# Altium PCB EncoderBoard.PcbDoc
Units mil, origin at the board's own origin, x right, y up, seen from the top; angles counter-clockwise.
Board outline 5215.28 x 1965.03 mil, 2 copper layers (Top Layer, Bottom Layer); 29 components, 26 nets, 113 pads, 10 vias.
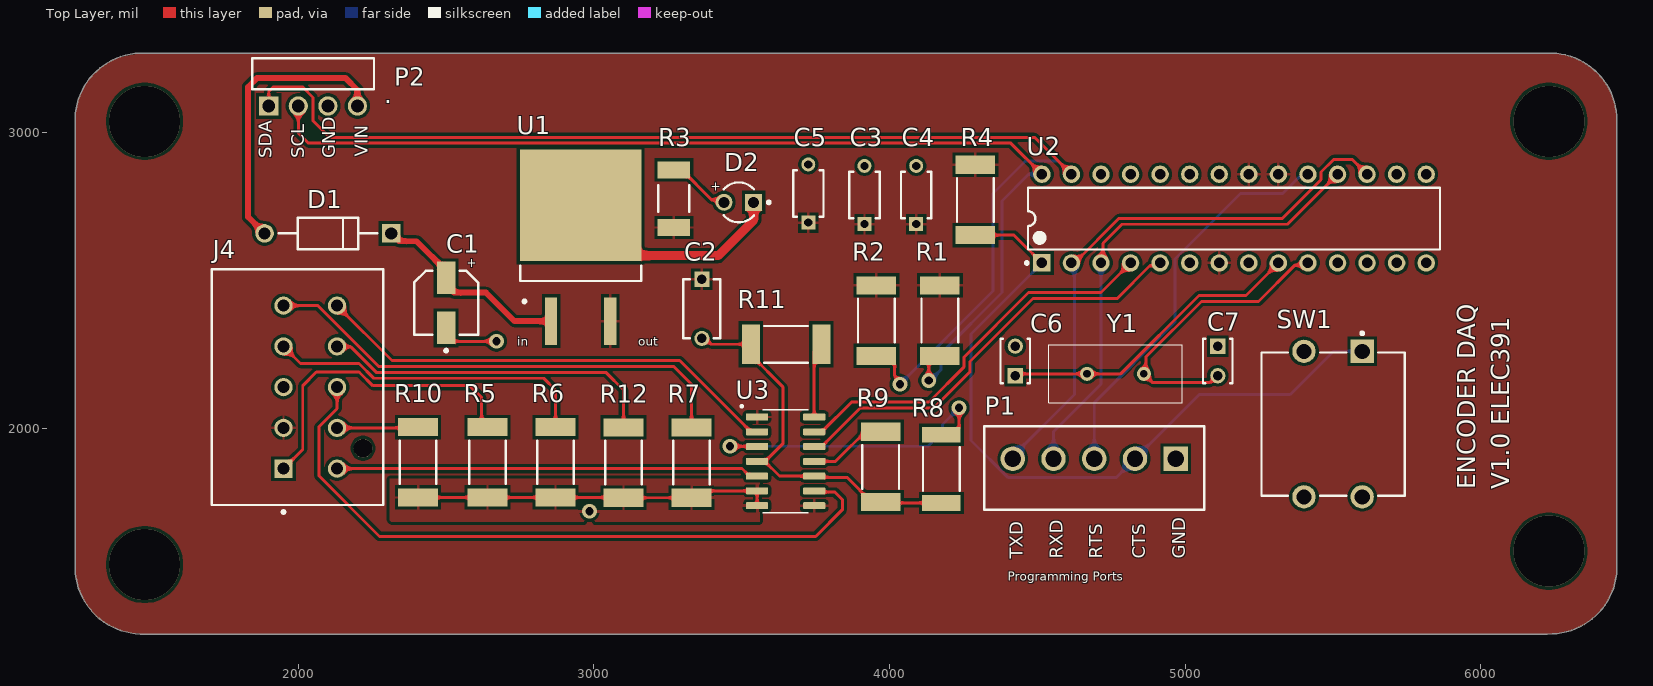
[diagram p0: Top Layer view]
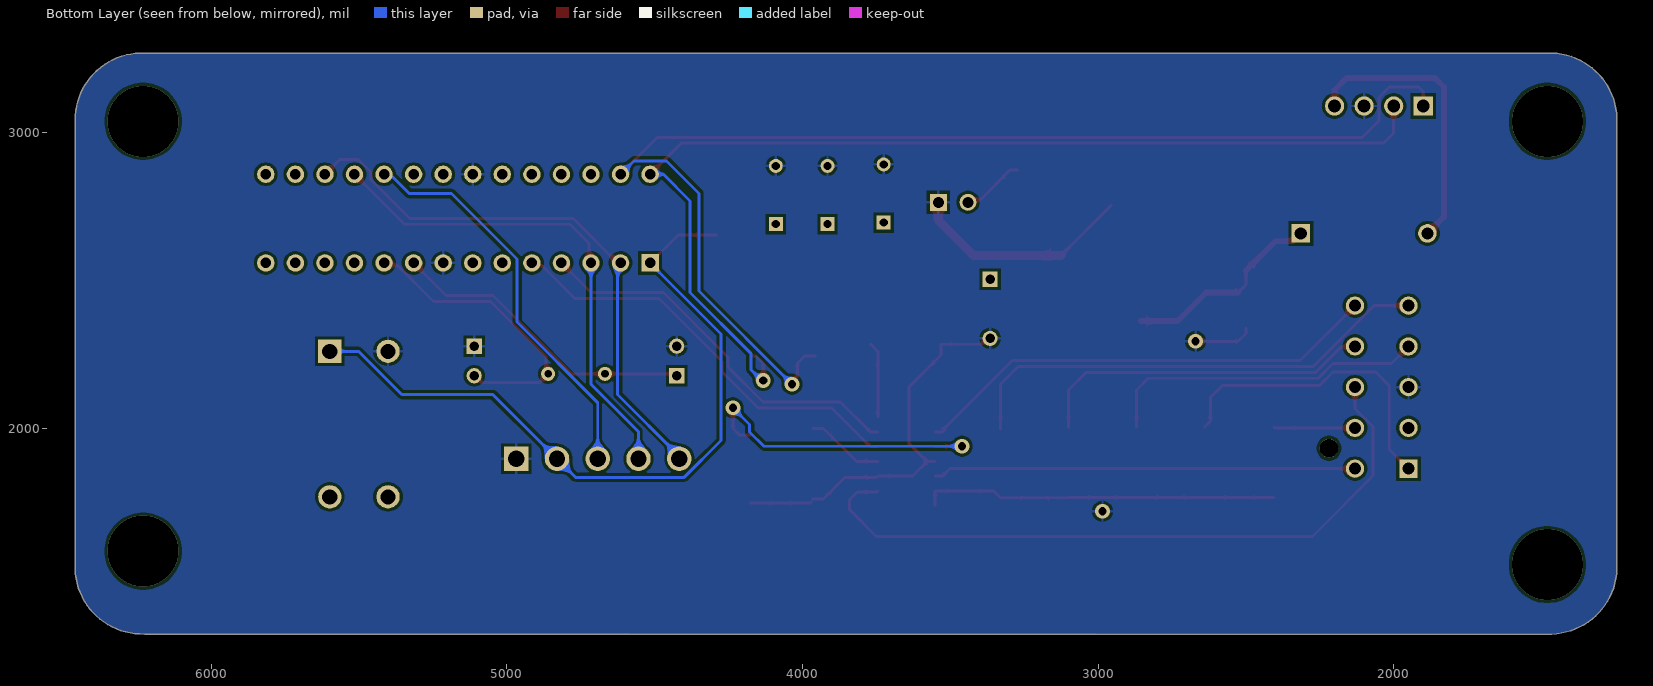
[diagram p1: Bottom Layer view, seen from below]
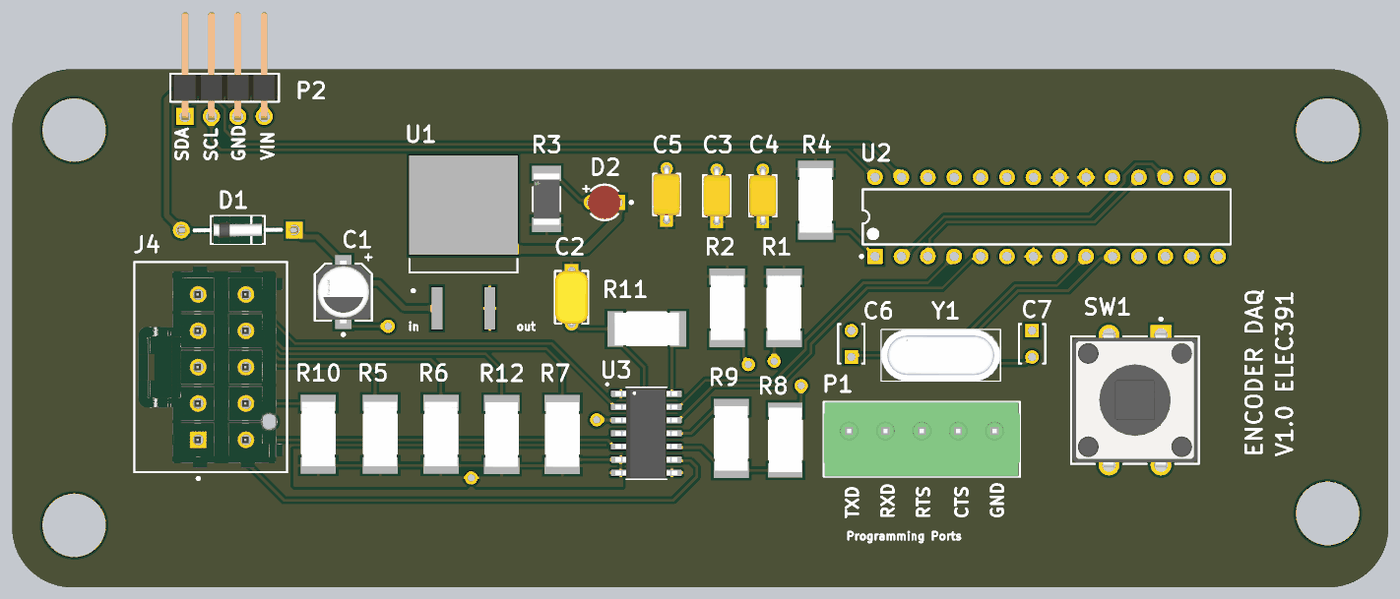
[diagram p2: 3D render of the assembled board from above, using the file's embedded part models]

## Layer stack, top to bottom
Top Solder: solder mask 0.4, Solder Resist, Dk 3.5
Top Layer: signal copper 1.4
Dielectric 1: dielectric 12.6, FR-4, Dk 4.8
Bottom Layer: signal copper 1.4
Bottom Solder: solder mask 0.4, Solder Resist, Dk 3.5

## Board outline
1464.83,1304.99 cw(c1472.5,1532.5) 1244.99,1524.83 cw(c1472.5,1532.5) 1244.98,1540.08 1244.98,3050 cw(c1250,3050) 1244.99,3050.17 cw(c1472.5,3042.5) 1480.08,3270.01 6240,3270.01 cw(c6240,3265) 6240.17,3270.01 cw(c6232.5,3042.5) 6460.14,3042.5 cw(c6232.5,3042.5) 6460.02,3034.92 6460.02,1570 6460.02,1525 cw(c6455,1525) 6460.01,1524.83 cw(c6232.5,1532.5) 6224.92,1304.98 1465,1304.98 cw(c1465,1310)

## Design rules (kind name [scope] priority, off if disabled: settings)
Clearance [All] p1: gap=10 ignorepadtopadclearanceinfootprint=FALSE except(0: Arc-Hole Track-Hole SMDPad-Hole THPad-Hole Via-Hole Fill-Hole Poly-Hole Region-Hole Text-Hole)
HoleSize [All] p1: absolutevalues=TRUE maxlimit=500 minlimit=1 maxpercent=80.000 minpercent=20.000
PolygonConnect [All] p1: connectstyle=Relief reliefconductorwidth=10 reliefentries=4 polygonreliefangle="90 Angle" airgapwidth=10
RoutingVias [All] p1: holewidth=28 width=50 viastyle="Through Hole" minholewidth=28 minwidth=50 maxholewidth=28 maxwidth=50
SolderMaskExpansion [All] p1: expansion=4 istentingtop=FALSE
Width [(InNet('5V') AND InNet('Vin'))] p1: maxlimit=50 minlimit=10 preferedwidth=20 minimp=50.000000 maximp=50.000000 favimp=50.000000
29 further rules are at their usual default settings.

## Components (designator, comment, footprint, x,y, rotation, side; value= is the part's Value field where it differs from the comment)
C1 "10uF" FP-FKC-MFG 2500,2425 r90 top
C2 "0.1uF" FP-C322C104K5R5TA-MFG 3365,2404.92 r270 top
C3 "0.1uF" FP-K15H5-MFG 3915,2790 r90 top
C4 "0.1uF" FP-K15H5-MFG 4090,2790 r90 top
C5 "0.1uF" FP-K15H5-MFG 3725,2795 r90 top
C6 "22pF" KEMT-C315-THT-2 4425,2228.5 r90 top
C7 "22pF" KEMT-C315-THT-2 5110,2228.5 r270 top
D1 "Diode" FP-UF4007-MFG 2100,2660 r180 top value=17pF
D2 "RED LED" FP-HLMP-1301-MFG 3490,2765 r180 top
J4 "EncoderA" FP-1722981210-MFG 1997.24,2140 r90 top
P1 "ProgrammingInputs" 691321100005 4692.2,1866.5 r180 top
P2 "ToMaster" 61300411021 2050,3200 r180 top
R1 "10K" FP-CRCW2512-e3-IPC_A 4170,2365 r90 top
R2 "10K" FP-CRCW2512-e3-IPC_A 3955,2365 r90 top
R3 "330Ohm" FP-CRCW2010-e3-MFG 3270,2777.44 r90 top
R4 "10K" FP-CRCW2512-e3-IPC_A 4290,2773.15 r90 top
R5 "10K" FP-CRCW2512-e3-IPC_A 2640,1885.88 r270 top
R6 "10K" FP-CRCW2512-e3-IPC_A 2870,1885.88 r270 top
R7 "10K" FP-CRCW2512-e3-IPC_A 3330,1885 r270 top
R8 "200K" FP-CRCW2512-e3-IPC_B 4175,1863.55 r90 top
R9 "10K" FP-CRCW2512-e3-IPC_A 3970,1870 r270 top
R10 "10K" FP-CRCW2512-e3-IPC_A 2405,1885.88 r270 top
R11 "10K" FP-CRCW2512-e3-IPC_A 3650,2285 r180 top
R12 "10K" FP-CRCW2512-e3-IPC_A 3100,1885 r270 top
SW1 "PushButton" FP-FSM103-MFG 5500,2015 r90 top
U1 "L7805" TO-263_M 2955,2613.27 r90 top
U2 "ATmega328P-PU" 28P3 5165,2710 r90 top
U3 "LS7082N1-S" SOIC127P600X175-14N 3648.35,1889.02 r0 top
Y1 "16MHZ" ABL16000MHZB2 4860,2185 r180 top

## Footprints (in the part's own frame and the unit in brackets; to place one, negate y for a bottom-side part, rotate by r counter-clockwise, add the part's x,y. Pads: shape width x height; smd on the part's side, far side on the other; paste and mask are expansions set on the pad)
28P3 [mm] "28-Pin Plastic Dual In-Line Package (PDIP)"
  rect 1.5x1.5 hole 0.9: 1(-3.81,16.51)
  round 1.5 hole 0.9: 2(-3.81,13.97) 3(-3.81,11.43) 4(-3.81,8.89) 5(-3.81,6.35) 6(-3.81,3.81) 7(-3.81,1.27) 8(-3.81,-1.27) 9(-3.81,-3.81) 10(-3.81,-6.35) 11(-3.81,-8.89) 12(-3.81,-11.43) 13(-3.81,-13.97) 14(-3.81,-16.51) 15(3.81,-16.51) 16(3.81,-13.97) 17(3.81,-11.43) 18(3.81,-8.89) 19(3.81,-6.35) 20(3.81,-3.81) 21(3.81,-1.27) 22(3.81,1.27) 23(3.81,3.81) 24(3.81,6.35) 25(3.81,8.89) 26(3.81,11.43) 27(3.81,13.97) 28(3.81,16.51)
  silkscreen extent -3.93,-17.7 2.65,17.93, body extent -3.6,-17.65 3.6,17.65, height 4.58
61300411021 [mm] "Pin Header, pitch 2.54 mm, THT, Angled, single row, 4p"
  rect 1.65x1.65 hole 1.1: 1(3.81,2.77)
  round 1.65 hole 1.1: 2(1.27,2.77) 3(-1.27,2.77) 4(-3.81,2.77)
  silkscreen extent -5.23,-1.35 5.23,1.35, body extent -5.08,-7.27 5.08,3.09, height 2.58
691321100005 [mm] "Vertical PCB Header, pitch 3.5mm, 05p"
  rect 2.1x2.1 hole 1.4: 1(-7,-0.8)
  round 2.1 hole 1.4: 2(-3.5,-0.8) 3(0,-0.8) 4(3.5,-0.8) 5(7,-0.8)
  silkscreen extent -9.45,-3.6 9.45,3.6, body extent -9.45,-3.6 9.45,3.6, height 9.3
ABL16000MHZB2 [mm]
  round 1.205 hole 0.657: 1(0,0) 2(4.88,0)
  silkscreen extent -3.31,-2.5 8.19,2.5, body extent -3.31,-2.5 8.19,2.5, height 3.5
FP-1722981210-MFG [mm]
  rect 1.57x1.57 hole 1.02 paste-1000 mask+0: 1(-7,1.2)
  round 1.57 hole 1.02 paste-1000 mask+0: 2(-3.5,1.2) 3(0,1.2) 4(3.5,1.2) 5(7,1.2) 6(-7,-3.4) 7(-3.5,-3.4) 8(0,-3.4) 9(3.5,-3.4) 10(7,-3.4)
  round 1.6 hole 1.6 unplated paste-1000 mask+0: ""(-5.25,-5.63)
  silkscreen extent -10.85,-7.35 10.12,7.35, body extent -10.23,-7.45 10.23,7.45, height 0.25
FP-C322C104K5R5TA-MFG [mm]
  rect 1.3x1.3 hole 0.8 paste-1000 mask+0: 1(-2.54,0)
  round 1.3 hole 0.8 paste-1000 mask+0: 2(2.54,0)
  silkscreen extent -2.54,-1.59 2.54,1.59, body extent -3.29,-1.69 3.29,1.69, height 0.25
FP-CRCW2010-e3-MFG [mm]
  rect 1.45x2.8 smd paste+0 mask+0: 1(-2.475,0) 2(2.475,0)
  silkscreen extent -1.14,-1.33 1.14,1.33, body extent -3.3,-1.5 3.3,1.5, height 0.25
FP-CRCW2512-e3-IPC_A [mil]
  rect 61.22x134.18 smd paste+0 mask+0: 1(-119.12,0) 2(119.12,0)
  silkscreen extent -74,-62 74,62, body extent -169,-87 169,87, height 10
FP-CRCW2512-e3-IPC_B [mil]
  rect 53.34x130.24 smd paste+0 mask+0: 1(-115.18,0) 2(115.18,0)
  silkscreen extent -74,-62 74,62, body extent -152,-75 152,75, height 10
FP-FKC-MFG [mm]
  rect 2.8x1.6 smd paste+0 mask+0: 1(-2.15,0) 2(2.15,0)
  silkscreen extent -4.22,-2.75 2.75,2.75, body extent -3.8,-3 3.8,3, height 0.25
FP-FSM103-MFG [mm]
  rect 2x2 hole 1.3 paste-1000 mask+0: 1(6.25,-2.5)
  round 2 hole 1.3 paste-1000 mask+0: 2(-6.25,-2.5) 3(6.25,2.5) 4(-6.25,2.5)
  silkscreen extent -6.15,-6.15 7.92,6.15, body extent -7.35,-6.25 7.35,6.25, height 0.25
FP-HLMP-1301-MFG [mm]
  rect 1.45x1.45 hole 0.95 paste-1000 mask+0: 1(-1.27,0)
  round 1.45 hole 0.95 paste-1000 mask+0: 2(1.27,0)
  silkscreen extent -2.7,-1.71 1.3,1.71, body extent -2.22,-2.22 2.22,2.22, height 0.25
FP-K15H5-MFG [mm]
  rect 1.2x1.2 hole 0.7 paste-1000 mask+0: 1(-2.5,0)
  round 1.2 hole 0.7 paste-1000 mask+0: 2(2.5,0)
  silkscreen extent -2,-1.3 2,1.3, body extent -3.2,-1.4 3.2,1.4, height 0.25
FP-UF4007-MFG [mm]
  rect 1.6x1.6 hole 1.05 paste-1000 mask+0: 1(-5.438,0)
  round 1.6 hole 1.05 paste-1000 mask+0: 2(5.438,0)
  silkscreen extent -4.24,-1.35 4.24,1.35, body extent -6.34,-1.45 6.34,1.45, height 0.25
KEMT-C315-THT-2 [mm] "THD, 2-Leads, Body 3.81x2.54mm"
  rect 1.3x1.3 hole 0.8: 1(-1.27,0)
  round 1.3 hole 0.8: 2(1.27,0)
  silkscreen extent -1.91,-1.27 1.91,1.27, body extent -1.91,-1.27 1.91,1.27, height 4.66
SOIC127P600X175-14N [mm]
  rrect25% 1.9x0.6 smd: 1(-2.455,3.81) 2(-2.455,2.54) 3(-2.455,1.27) 4(-2.455,0) 5(-2.455,-1.27) 6(-2.455,-2.54) 7(-2.455,-3.81) 8(2.455,-3.81) 9(2.455,-2.54) 10(2.455,-1.27) 11(2.455,0) 12(2.455,1.27) 13(2.455,2.54) 14(2.455,3.81)
  silkscreen extent -3.87,-4.43 1.95,4.82, body extent -3,-4.32 3,4.32, height 1.75
TO-263_M [mm] "D2-PAK, 4-Leads, Body 9.2x10.2mm, Pitch 2.54mm, Lead Span 15.4mm, IPC Low Density"
  rect 4.1x1.05 smd: 1(-6.35,2.54) 3(-6.35,-2.54)
  rect 9.6x10.45 smd: 4(3.6,0)
  silkscreen extent -4.78,-5.2 -1.6,5.2, body extent -2.9,-5.2 6.45,5.2, height 4.6

## Part data
C1: library part CMP-05427-000030-1, "CAP ALUM 10UF 20% 50V SMD", Case/Package=Radial, Dielectric Material=Aluminium, ESR (Equivalent Series Resistance)=1.52R, Leakage Current=3uA, Max Operating Temperature=105°C, Min Operating Temperature=-55°C, Package Quantity=1000, Ripple Current=85mA, Tolerance=20%, Voltage=50V, Capacitance=10uF, Construction=Cylindrical, Contact Plating=Tin, Diameter=5mm, Height=5.8mm, Height - Seated (Max)=0.228inch, Impedance=1.52R, Lead Free="Lead Free", Length=5.8mm, Life (Hours)=2000Hour, Material=Aluminium, Mount="Surface Mount", Number of Pins=2, Packaging="Tape and Reel", Radiation Hardening=No, REACH SVHC="No SVHC", Ripple Current (AC)=85mA, RoHS Compliant=Yes, Series=FK, Termination=SMD/SMT, Voltage Rating=50V, Voltage Rating (DC)=50V, Width=6.5mm
C2: library part CMP-03020-034661-1, "CAP CER 0.1UF 50V X7R RADIAL", Capacitance=100nF, Case/Package=Radial, Dielectric=X7R, Dielectric Material=Ceramic, Max Operating Temperature=125°C, Min Operating Temperature=-55°C, Package Quantity=500, Tolerance=10%, Voltage=50V, Construction=RADIAL, Depth=3.18mm, Dissipation Factor=2.5%, Height=3.18mm, Height - Seated (Max)=0.26inch, Lead Diameter=0.51mm, Lead Free="Lead Free", Lead Length=7mm, Lead Pitch=5.08mm, Lead/Base Style="Formed Leads", Length=5.08mm, Material=Ceramic, Mount="Through Hole", Number of Pins=2, Packaging=Bulk, Radiation Hardening=No, REACH SVHC="No SVHC", RoHS Compliant=Yes, Series="Golden Max™", Termination=Radial, Voltage Rating=50V, Voltage Rating (DC)=50V, Weight=0.0625lb, Width=0.125inch
C3 C4 C5: library part CMP-02417-000048-1, "CAP CER 0.1UF 50V X7R RADIAL", Capacitance=100nF, Case/Package=Dipped, Dielectric=X7R, Max Operating Temperature=125°C, Min Operating Temperature=-55°C, Package Quantity=5000, Tolerance=10%, Voltage=50V, Construction=RADIAL, Depth=2.5mm, Diameter=500um, Height=4mm, Height - Seated (Max)=0.1inch, Lead Diameter=0.5mm, Lead Length=30mm, Lead Pitch=5mm, Lead/Base Style="Formed Leads", Length=4mm, Mount="Through Hole", Packaging=Bulk, Radiation Hardening=No, RoHS Compliant=Yes, Series=K, Termination=Radial, Thickness=2.6mm, Voltage Rating=50V, Voltage Rating (DC)=50V, Weight=0.005644oz, Width=2.5mm
C6 C7: library part CMP-1664-00008-1, "Capacitor, Ceramic, 22 pF, +/-10 %, 100 V, -55 to 125 degC, 2-Pin THD, RoHS, Bulk", Case\Package=TO-220, Max Input Voltage="40 V", Max Operating Temperature="125 degC", Max Ouput Current="1.5 A", Min Input Voltage="4.2 V", Min Operating Temperature="0 degC", Output Voltage="1.2 V", Package Quantity=50, ComponentLink1Description="Manufacturer URL", ComponentLink1URL=http://www.kemet.com/, ComponentLink2Description=Datasheet, ComponentLink2URL=http://capacitoredge.kemet.com/capedge2/DataSheet/Datasheet-C315C220K1G5TA.pdf?pn=C315C220K1G5TA{BULK}, DatasheetVersion=Aug-16, Height="9.28 mm", Length="10.28 mm", Mount="Through Hole", Output Current="1.5 A", Outputs=1, PackageDescription="2-Pin Through Hole Device, Body 3.81 x 2.54 mm", PackageReference=C315-THT-2, Packaging=Rail/Tube, Pins=3, Radiation Hardening=No, REACH SVHC="No SVHC", RoHSCompliant=true, Weight="0.08113 oz", Width="4.82 mm"
D1: library part CMP-02540-000043-1, "DIODE GEN PURP 1KV 1A DO204AL", Capacitance=17pF, Forward Current=1A, Manufacturer=Vishay, Manufacturer Part Number=UF4007-E3/54, Max Junction Temp=+150°C, Max Repetitive Reverse Voltage=1000V, Max Surge Forward Current=30A, Package=UF4007, Peak Reverse Current=10uA, Temperature="-55°C to +150°C", Temperature Range Low=-55°C, Automotive=No, Category=Diode, ComponentLink2Description=Datasheet, ComponentLink2URL=http://www.vishay.com/docs/88755/uf4001.pdf, Device Class L1="Discrete Semiconductors", Device Class L2=Diodes, Device Class L3="Rectifier Diodes", Digikey Description="DIODE GEN PURP 1KV 1A DO204AL", Height=2.7mm, Ipc Land Pattern Name=DIOPA1088W105L520D270, Lead Free=Yes, Mouser Description="Rectifiers Vr/1000V Io/1A", Octopart=https://octopart.com/uf4007-e3%2F54-vishay-42333894, RoHS=TRUE, Temperature Range High=+150°C
D2: library part CMP-18399-000007-1, "LED RED DIFFUSED T-1 T/H", Colour=Red, Forward Current=10mA, Forward Voltage=1.9V, Manufacturer=Broadcom, Manufacturer Part Number=HLMP-1301, Max Junction Temp=+110°C, Package=0, Reverse Voltage=5V, Temperature="-40°C to +100°C", Temperature Range High=+100°C, Temperature Range Low=-40°C, Automotive=No, Category=Diode, ComponentLink2Description=Datasheet, ComponentLink2URL=https://docs.broadcom.com/docs/AV02-1555EN, Device Class L1=Optoelectronics, Device Class L2=LEDs, Device Class L3=unset, Digikey Description="LED RED DIFFUSED T-1 T/H", Lead Free=Yes, Led Orientation=Straight, Luminous Intensity=3.4mcd, Mouser Description="Standard LEDs - Through Hole Red Diffused 635nm 3.4mcd", Octopart=https://octopart.com/hlmp-1301-broadcom-71130345, Peak Emmision Wavelength=635nm, RoHS=TRUE, Viewing Angle=60°, Wavelength=626nm
J4: library part CMP-04776-000117-1, "CONN HEADER VERT 10POS 3.5MM", Current Rating=11A, Manufacturer=Molex, Manufacturer Part Number=1722981210, Package=0, Temperature="-40°C to +120°C", Temperature Range High=+120°C, Temperature Range Low=-40°C, Voltage Rating=400V, Automotive=No, Category=Conn, ComponentLink2Description=Datasheet, ComponentLink2URL=http://www.molex.com/webdocs/datasheets/pdf/en-us/1722981210_PCB_HEADERS.pdf, Conn Gender=Male, Conn Orientation=Vertical, Contact Material=Tin,Nickel, Device Class L1=Connectors, Device Class L2="Headers and Wire Housings", Device Class L3=unset, Digikey Description="CONN HEADER VERT 10POS 3.5MM", Footprint Url=https://www.molex.com/pdm_docs/sd/1722981210_sd.pdf, Height=14.5mm, Lead Free=Yes, Number of Contacts=10, Number of Rows=2, Octopart=https://octopart.com/172298-1210-molex-60759931, Pitch=3.5mm, RoHS=TRUE, Standoff Height=0.35mm
P1: library part CMP-1502-01786-1, "Serie 3211 - 3.50mm Vertical PCB Header WR-TBL, 5 pin", Manufacturer="Wurth Elektronik", Operating Temperature=-40to105degC, Package Reference=691321100005, Datasheet URL=http://katalog.we-online.de/em/datasheet/6913211000xx.pdf, Gender=Male, Manufacturer URL=http://www.we-online.de, Mounting Technology=THT, Packaging=Box, Part Number=691321100005, Pin Number=5, Pitch=3.50mm, Publisher=WurthElektronik
P2: library part CMP-1502-01063-1, "THT Angled Pin Header WR-PHD, Pitch 2.54 mm, Single Row, 4 pins", Contact Resistance=20mOhm, Manufacturer="Wurth Elektronik", Operating Temperature=-40to105degC, Package Reference=61300411021, Rated Current=3A, Withstanding Voltage=500VAC, Working Voltage=250VAC, Datasheet URL=https://katalog.we-online.de/em/datasheet/6130xx11021.pdf, Gender=Male, Manufacturer URL=http://www.we-online.de, Mounting Technology=THT, Orientation=Angled, Packaging=Bag, Part Number=61300411021, Pin Number=4, Pitch=2.54mm, Publisher=WurthElektronik, Row Number=Single
R1 R2 R4 R5 R6 R7 R9 R10 R11 R12: library part CMP-02407-002758-1, "RES Thick Film, 10kΩ, 5%, 1W, 200ppm/°C, 2512", Case Code (Imperial)=2512, Case Code (Metric)=6432, Max Operating Temperature=155°C, Max Power Dissipation=1W, Min Operating Temperature=-55°C, Package Quantity=1, Resistance=10kR, Temperature Coefficient=200ppm/°C, Tolerance=5%, Voltage Rating=500V, Case/Package=2512, Composition="Thick Film", Contact Plating=Tin, Depth=3.15mm, Features="Automotive AEC-Q200", Height=0.028inch, Lead Free="Lead Free", Length=6.3mm, Military Standard=Not, Mount="Surface Mount", Number of Pins=2, Number of Terminations=2, Packaging="Tape and Reel", Power Rating=1W, Radiation Hardening=No, REACH SVHC="No SVHC", Termination=SMD/SMT, Voltage Rating (DC)=500V, Weight=0.001429oz, Width=0.124inch
R3: library part CMP-1017-00062-2, "RES Thick Film, 330Ω, 5%, 0.75W, 200ppm/°C, 2010", Case Code (Imperial)=2010, Case Code (Metric)=5025, Max Operating Temperature=155°C, Max Power Dissipation=750mW, Min Operating Temperature=-55°C, Package Quantity=4000, Resistance=330R, Temperature Coefficient=200ppm/°C, Tolerance=5%, Voltage Rating=400V, Case/Package=2010, Composition="Thick Film", Contact Plating=Tin, Depth=2.5mm, Features="Automotive AEC-Q200", Height=0.6mm, Lead Free="Lead Free", Length=5mm, Military Standard=Not, Number of Terminations=2, Packaging="Tape and Reel", Power Rating=750mW, Radiation Hardening=No, Termination=SMD/SMT, Voltage Rating (DC)=400V, Weight=0.000899oz, Width=2.5mm
R8: library part CMP-02407-005119-1, "RES Thick Film, 200kΩ, 5%, 1W, 200ppm/°C, 2512", Case Code (Imperial)=2512, Case Code (Metric)=6432, Max Operating Temperature=155°C, Max Power Dissipation=1W, Min Operating Temperature=-55°C, Package Quantity=1, Resistance=200kR, Temperature Coefficient=200ppm/°C, Tolerance=5%, Voltage Rating=500V, Case/Package=2512, Composition="Thick Film", Contact Plating=Tin, Features="Automotive AEC-Q200", Height=0.028inch, Lead Free="Lead Free", Length=6.3mm, Mount="Surface Mount", Number of Pins=2, Number of Terminations=2, Packaging="Tape and Reel", Power Rating=1W, Radiation Hardening=No, Voltage Rating (DC)=500V, Weight=0.001429oz, Width=3.15mm
SW1: library part CMP-03407-000037-1, "SWITCH TACTILE SPST-NO 0.05A 24V", Actuator Color=Black, Contact Current Rating=50mA, Contact Resistance=100mR, Max Operating Temperature=85°C, Max Voltage Rating (DC)=12V, Min Operating Temperature=-35°C, Operating Force=1.57N, Package Quantity=400, Voltage Rating=24V, Actuator Length=3.4mm, Actuator Material=Polyester, Contact Material=Brass, Contact Plating=Silver, Current Rating=50mA, Depth=14.1mm, Electrical Life=100000Cycles, Illumination Type=Non-Illuminated, Length=12mm, Max Current Rating=50mA, Mechanical Life=100000Cycles, Mount="Through Hole", Orientation=Straight, Packaging="Loose Piece", Radiation Hardening=No, RoHS Compliant=Yes, Series="FSM100 ~ 104", Switch Function=Off-Mom, Switch Travel=0.3mm, Termination="PC Pins", Throw Configuration=SPST, Type=Switch, Voltage Rating (DC)=12V, Width=12mm
U1: library part CMP-0244-00213-1, "Positive Voltage Regulator, 3-Pin D2PAK, Tape and Reel", ComponentLink1Description="Manufacturer URL", ComponentLink1URL=http://www.st.com, ComponentLink2Description=Datasheet, ComponentLink2URL=http://www.st.com/internet/com/TECHNICAL_RESOURCES/TECHNICAL_LITERATURE/DATASHEET/CD00000444.pdf, DatasheetVersion=16/11/2011, PackageDescription="3-Pin Transistor Outline Package 2.54 mm Pitch, 15.4 mm Lead Span (D2PAK)", PackageReference=TO-263, PackageVersion=2011
U2: library part CMP-0095-00013-2, "8-bit AVR Microcontroller, 32KB Flash, 1KB EEPROM, 2KB SRAM, 28-pin PDIP, Industrial Grade (-40°C to 85°C)", ComponentLink1Description="Manufacturer URL", ComponentLink1URL=http://www.atmel.com/, ComponentLink2Description="ATmega48A/48PA/88A/88PA/168A/168PA/328/328P Datasheet", ComponentLink2URL=http://www.atmel.com/dyn/resources/prod_documents/8271.pdf, ComponentLink3Description="ATmega48A/48PA/88A/88PA/168A/168PA/328/328P Summary", ComponentLink3URL=http://www.atmel.com/dyn/resources/prod_documents/8271S.pdf, DatasheetVersion="revD, May-2011", PackageDescription="28-lead (0.300\"/7.62mm Wide) Plastic Dual Inline Package (PDIP)", PackageReference=28P3, PackageVersion="revB, Sep-2001", RevisionNote="DatasheetVersion updated. URLs added."
U3: Package=None, Availability=Unavailable, MF="{'manufacturer': u'LSI/CSI'}", MP=LS7082N1-S, Price=None
Y1: library part ABL-16.000MHZ-B2, "Crystal or Oscillator", Manufacturer_Name=ABRACON, Mouser Part Number=815-ABL-16-B2, Arrow Part Number=ABL-16.000MHZ-B2, Arrow Price/Stock=https://www.arrow.com/en/products/abl-16.000mhz-b2/abracon, Datasheet Link=http://www.abracon.com/Resonators/ABL.pdf, Height=3.5mm, Manufacturer_Part_Number=ABL-16.000MHZ-B2, Mouser Price/Stock=https://www.mouser.co.uk/ProductDetail/ABRACON/ABL-16000MHZ-B2?qs=A7YjigRBFZlH19Ss3q%252BAbA%3D%3D

## Via types
v1: diameter 50, hole 28, Top Layer to Bottom Layer, 6 vias
v2: diameter 240, hole 240, Top Layer to Bottom Layer, 4 vias

## Nets (pads, with @x,y where several pads share a name; then routed paths per layer and width w, separated by ;. In a path a pad name is that pad's centre, name@x,y a point inside that pad or via, vN(x,y) a via of type N, cw(c..) or ccw(c..) an arc to the next point about the centre after c; other vN are vias at no path point)
5V: C2.1 C3.1 C4.1 C5.1 J4.2 R1.2 R2.2 R3.1 R4.2 U1.3 U2.7 U2.20 U2.21 U3.1 U3.8
A: J4.6 U3.5 | length 1431.1
  Top Layer w10: J4.6 3500.71,1864.41 3526.1,1839.02 U3.5
B: J4.8 U3.9 | length 2359.5
  Top Layer w10: J4.8 2131.1,2067.12 2070,2006.02 2070,1840 2275,1635 3750,1635 3840,1725 3840,1760 3814.84,1785.16 3748.86,1785.16 U3.9
CTS: P1.2 R4.1 SW1.1 U2.1 | length 2515.1
  Top Layer w10: R4.1 4420.97,2654.03 U2.1
  Bottom Layer w10: U2.1 4275,2320 4275,1959.93 4399.93,1835 4767.01,1835 P1.2 5047.01,2115 5355,2115 5501.06,2261.06 SW1.1
DNCK: U2.5 U3.12 | length 1447.7
  Top Layer w10: U3.12 3770.59,1939.02 3901.57,2070 4150,2070 4272.09,2192.09 4272.09,2227.09 4485,2440 4770,2440 4881.01,2551.01 4906.01,2551.01 U2.5
GND: C1.1 C2.2 C3.2 C4.2 C5.2 C6.2 C7.1 D2.1 J4.3 P1.1 P2.3 R5.2 R6.2 R7.2 R8.1 R9.2 R10.2 R11.2 R12.2 SW1.3 U1.4 U2.8 U2.22 U3.4 U3.6 U3.7 U3.10 | length 3486.8
  Top Layer w10: R10.2 R5.2 R6.2 3099.12,1766.76 R12.2 R7.2 3353.14,1789.02 U3.6 U3.7 ; C1.1 2500,2321.5 2526.5,2295 v1(2670,2295) ; U1.4 U1.4@3125,2585 ; C2.2 3376.14,2304.92 3396.06,2285 R11.2 3530.88,2248.52 3640,2139.4 3640,1950 3585.83,1895.83 3584.09,1895.83 3579.02,1890.75 3579.02,1889.02 U3.4 ; U3.4@3577.28,1889.02 3627.28,1839.02 U3.10 3749.02,1835 3855.66,1835 3928.52,1762.14 R9.2@3965,1762.14 ; R9.2 3972.52,1748.36 R8.1
  Top Layer w30: U1.4@3125,2585 3420,2585 3540,2705 D2.1
  other v1: 2985,1720
I: J4.10 U3.2 | length 1600.1
  Top Layer w10: J4.10 2316.69,2230 3290,2230 3519.29,2000.71 3519.29,1995.83 3526.1,1989.02 U3.2
NetC1_2: C1.2 D1.1 U1.1 | length 691.5
  Top Layer w10: D1.1 D1.1@2340.59,2633.5 ; C1.2@2500,2533.27 C1.2 2500,2486.02 C1.2@2526.5,2459.53
  Top Layer w20: D1.1@2340.59,2633.5 2399.76,2633.5 C1.2@2500,2533.27 ; C1.2@2526.5,2459.53 2634.78,2459.53 2731.04,2363.27 U1.1
NetC6_1: C6.1 U2.9 Y1.2 | length 1048
  Top Layer w10: C6.1 4431.5,2185 Y1.2 4781.5,2185 5046.5,2450 5205,2450 U2.9
NetC7_2: C7.2 U2.10 Y1.1 | length 1011.8
  Top Layer w10: C7.2 5107.89,2178.5 5084.38,2155 4890,2155 Y1.1 4866.57,2191.57 4866.57,2241.57 5055,2430 5247.97,2430 5370.47,2552.5 5407.5,2552.5 U2.10
NetD2_2: D2.2 R3.2 | length 215.5
  Top Layer w10: R3.2 3296.57,2874.88 3397.45,2774.01 3430.99,2774.01 D2.2
NetJ4_1: J4.1 R5.1 | length 1075.4
  Top Layer w10: J4.1 2015,1929.41 2015,2145 2060.95,2190.95 2061.2,2190.97 2205.95,2190.97 2208.88,2188.04 2251.92,2145 2580,2145 2620.25,2104.75 2620.25,2024.75 R5.1
NetJ4_4: J4.4 R6.1 | length 1107.9
  Top Layer w10: J4.4 1950,2275 1952.8,2275 2007.8,2220 2205.2,2220 2255.2,2170 2830,2170 2870,2130 R6.1
NetJ4_5: J4.5 R7.1 | length 1650.3
  Top Layer w10: J4.5@1950,2425 J4.5 2066.18,2415.59 2271.77,2210 3270,2210 3330,2150 R7.1@3330,1999.12
NetJ4_7: J4.7 R10.1 | length 275.1
  Top Layer w10: J4.7 2402.2,2002.2 R10.1
NetJ4_9: J4.9 R12.1 | length 1156
  Top Layer w10: J4.9 2132.42,2276.48 2177.01,2276.48 2263.49,2190 3040,2190 3100,2130 R12.1
NetR8_2: R8.2 U3.3 | length 1074.3
  Top Layer w10: v1(3460,1940) 3460.49,1939.51 3551.2,1939.51 U3.3 ; R8.2 4213.45,1978.73 4235.12,2000.4 4235.12,2069.88 v1(4235,2070)
  Bottom Layer w10: v1(3460,1940) 4130,1940 4178.67,1988.67 4178.67,2013.67 v1(4235,2070)
NetR9_1: R9.1 U3.11 | length 266.1
  Top Layer w10: U3.11 3817.15,1889.02 3928.52,2000.38 R9.1@3965,2000.38
NetR11_1: R11.1 U3.14 | length 256
  Top Layer w10: U3.14 3745,2260.88 R11.1
RTS: P1.3 U2.19 | length 1356.9
  Bottom Layer w10: P1.3 4692.2,2087.2 4965,2360 4965,2572.97 5187.03,2795 5330,2795 5385.61,2850.61 5405.61,2850.61 U2.19
RXD: P1.4 U2.3 U2.18 | length 1687.9
  Top Layer w10: U2.3 4721.49,2566.49 4721.49,2626.49 4785.94,2690.94 5345.94,2690.94 U2.18
  Bottom Layer w10: P1.4 4554.41,1989.41 4715,2150 U2.3
SCL: P2.2 R1.1 U2.28 | length 3655.5
  Top Layer w10: P2.2 2000,2999.22 2034.22,2965 4410,2965 U2.28 ; v1(4132.57,2162.43) 4132.57,2220.27 4158.18,2245.88 R1.1
  Bottom Layer w10: v1(4132.57,2162.43) 4137.43,2162.43 4174.37,2199.37 4174.37,2254.37 4380,2460 4380,2770 4470,2860 U2.28
SDA: P2.1 R2.1 U2.27 | length 4193.8
  Top Layer w10: P2.1 1900,3140 1915,3155 2015,3155 2050,3120 2050,3040.94 2105.94,2985 4490,2985 U2.27 ; R2.1 3991.48,2245.88 4017.09,2220.27 4017.09,2178.73 4035,2160.82 v1(4035,2150)
  Bottom Layer w10: v1(4035,2150) 4350,2465 4350,2795 4460,2905 4570,2905 U2.27
TXD: P1.5 U2.2 U2.17 | length 1933.3
  Top Layer w10: U2.2 4625,2560 4775.94,2710.94 5328.92,2710.94 5459.53,2841.56 5459.53,2867.5 5502.03,2910 5565,2910 U2.17
  Bottom Layer w10: P1.5 4416.61,1906.61 4625,2115 4625,2536.73 4615,2546.73 U2.2
UPCK: U2.4 U3.13 | length 1325.9
  Top Layer w10: U3.13 3770.59,1989.02 3871.57,2090 4133.03,2090 4252.09,2209.06 4252.09,2235.38 4252.09,2242.09 4470,2460 4715,2460 U2.4
Vin: D1.2 P2.4 | length 971.2
  Top Layer w20: D1.2 1830,2715.91 1830,3155 1860,3185 2160,3185 2200,3145 P2.4
pads on no net: J4. SW1.2 SW1.4 U2.6 U2.11 U2.12 U2.13 U2.14 U2.15 U2.16 U2.23 U2.24 U2.25 U2.26
copper on no net:
  other v2: 1480,1540 6230,1585 1480,3039.18 6230,3039.18

## Polygon pours and split planes (outlines as drawn)
5V on Top Layer "5V_L01_P002" (solid, pour order 2): 1355.38,3237.7 1393.75,3256.09 1465,3270.01 6190,3270.01 6242.5,3269.35 6269.79,3267.07 6295.21,3261.33 6340.84,3242.71 6380.44,3215.51 6409.76,3185.32 6433.2,3149.92 6450.59,3107.74 6460.01,3065 6460.01,1517.65 6452.13,1472.65 6435.48,1429.46 6410.91,1391.11 6378.46,1357.81 6342.43,1333.16 6301.16,1315.46 6256.53,1306.13 6211.38,1305.84 1554.7,1304.99 1493.48,1304.98 1462.2,1305.84 1432,1308.5 1403.84,1315.46 1375.85,1326.39 1325,1355 1294.09,1391.11 1269.52,1429.46 1260.07,1450.68 1252.87,1472.65 1247.98,1494.93 1245.34,1517.65 1244.99,3060 1248.69,3084.11 1251.25,3096.06 1254.41,3107.74 1271.8,3149.92 1296.68,3187.09 1324.56,3215.51
GND on Top Layer "GND_L01_P000" (solid, pour order 0): 2310,1830 2310,1690 2315,1685 3560,1685 3560,1825 3555,1830
GND on Bottom Layer "GND_L02_P001" (solid, pour order 1): 1353.84,3236.77 1400.02,3258.29 1449.2,3268.95 1500,3270.01 6217.59,3270.01 6262.55,3268.15 6304.98,3258.29 6345.1,3240.34 6381.32,3214.76 6407.86,3187.65 6429.41,3156.72 6446.84,3119.17 6457.14,3079.37 6459.83,1520.62 6457.14,1495.63 6451.98,1472.09 6443.68,1447.5 6432.43,1423.64 6404.61,1383.51 6368.03,1349.6 6345.1,1334.66 6321.06,1323.88 6296.73,1314.11 6270.57,1309.06 6244.38,1305.17 6217.59,1304.99 6165,1304.99 1428.95,1309.06 1392.93,1319.22 1356.71,1336.51 1324.48,1359.56 1295.44,1389.42 1272.58,1423.64 1256.63,1460.24 1244.99,1500 1244.99,3070 1268.57,3143.66 1287.98,3175.82 1313.16,3205.08

## Silkscreen, mask and mechanical layers (free items; w line width, h text height)
Top Overlay:
  text "." at 2290,3100 h60
  text "VIN" at 2235,2920 h45 r90
  text "SDA" at 1910,2915 h45 r90
  text "SCL" at 2020,2915 h45 r90
  text "GND" at 2125,2915 h45 r90
  text "+" at 3395,2805 h30
  text "+" at 2570,2545 h30
  text "in" at 2740,2280 h30
  text "out" at 3150,2280 h30
  text "ENCODER DAQ" at 5980,1795 h60 r90
  text "V1.0 ELEC391" at 6095,1795 h60 r90
  text "TXD" at 4450,1560 h45 r90
  text "RXD" at 4585,1560 h45 r90
  text "RTS" at 4720,1560 h45 r90
  text "CTS" at 4865,1560 h45 r90
  text "GND" at 5000,1560 h45 r90
  text "Programming Ports" at 4400,1485 h30
Mechanical 1:
  lines w10: 1250,1525 1252.33,3083.13 cw(c1438.14,3076.86) 1444.4,3262.68 6240,3265 cw(c6232.5,3042.5) 6455,3035 6455,1570 6455,1525 cw(c6232.5,1532.5) 6225,1310 1465,1310 cw(c1472.5,1532.5) 1250,1540